# Altium PCB PCB1.PcbDoc
Units mil, origin at the board's own origin, x right, y up, seen from the top; angles counter-clockwise.
Board outline 2135 x 990 mil, 2 copper layers (Top Layer, Bottom Layer); 9 components, 5 nets, 22 pads, 0 vias.
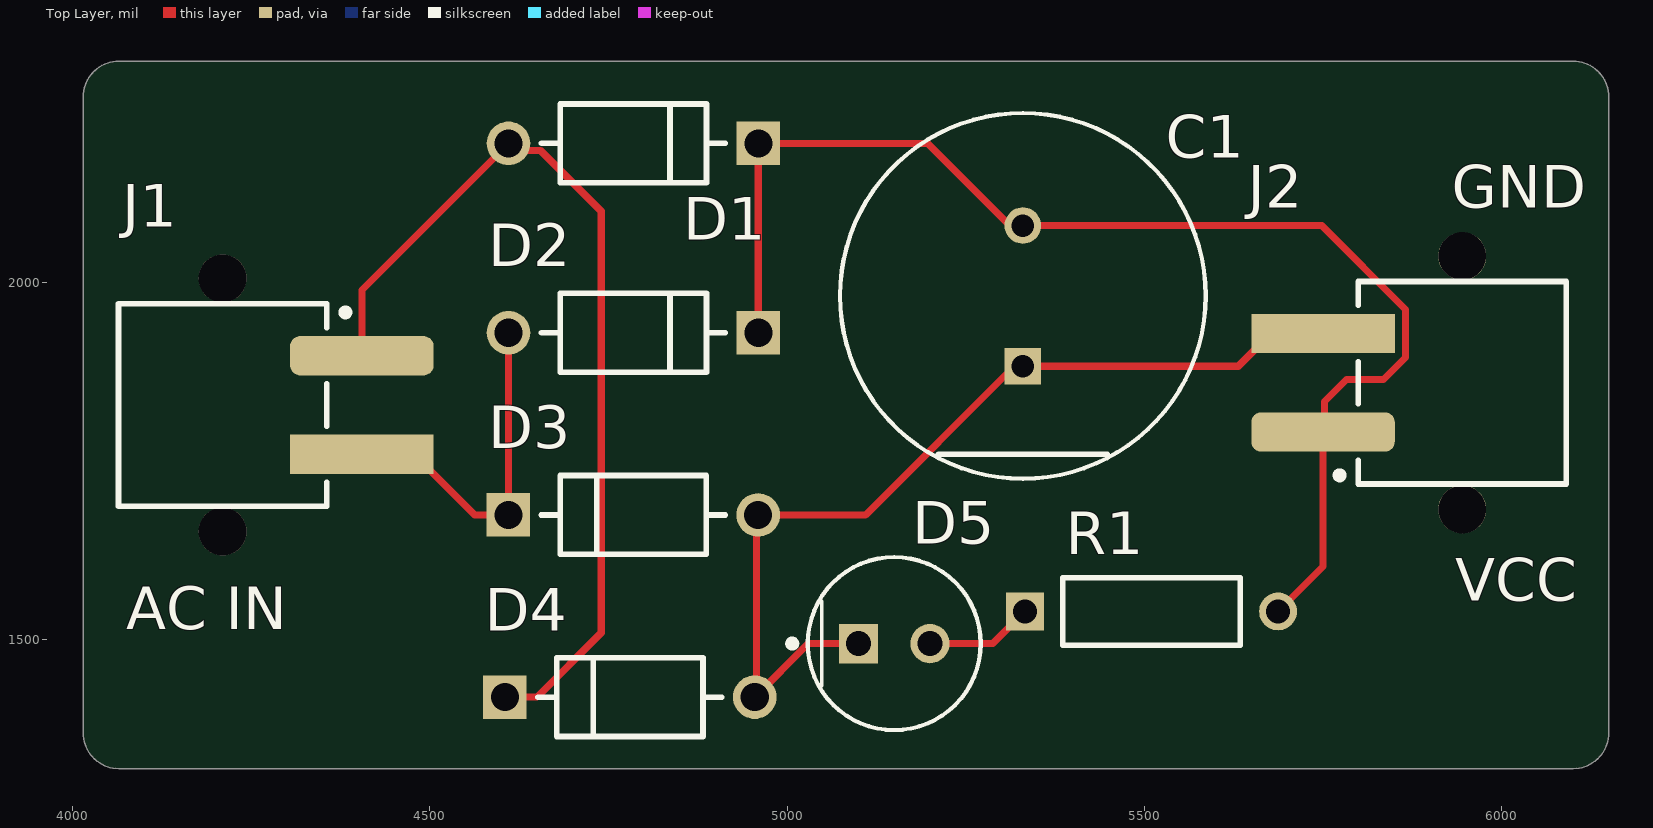
[diagram p0: Top Layer view]
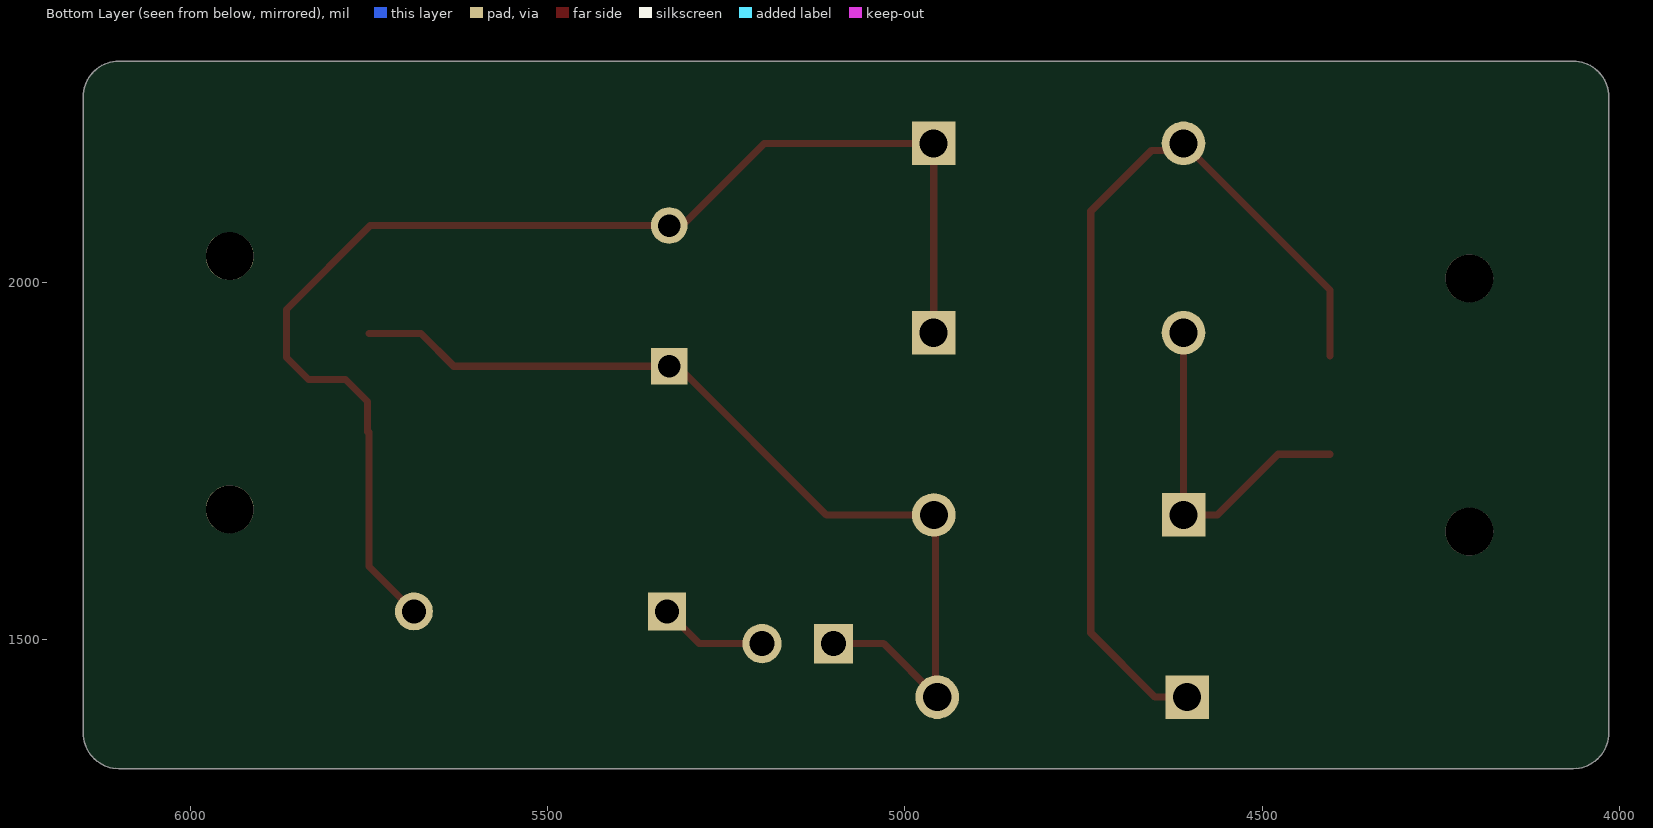
[diagram p1: Bottom Layer view, seen from below]
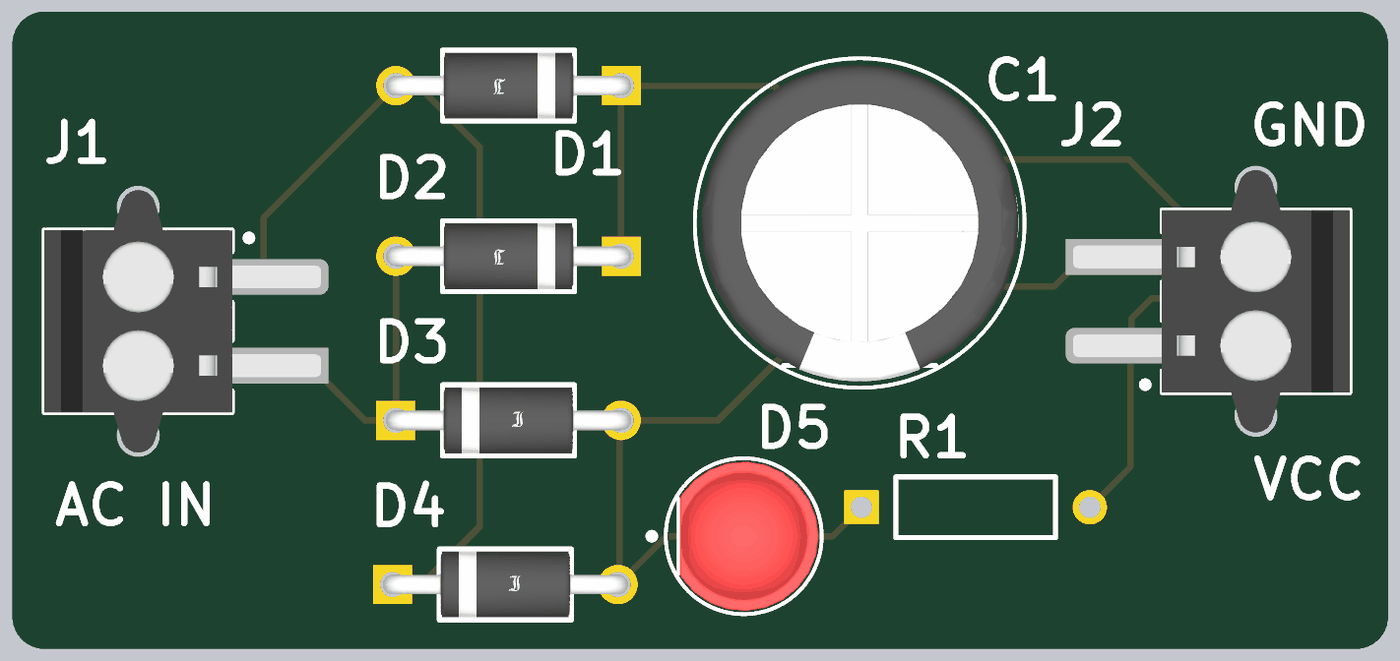
[diagram p2: 3D render of the assembled board from above, using the file's embedded part models]

## Layer stack, top to bottom
Top Solder: solder mask 0.4, Solder Resist, Dk 3.5
Top Layer: signal copper 1.4
Dielectric 1: dielectric 12.6, FR-4, Dk 4.8
Bottom Layer: signal copper 1.4
Bottom Solder: solder mask 0.4, Solder Resist, Dk 3.5

## Board outline
4015,1370 ccw(c4065,1370) 4065,1320 6100,1320 ccw(c6100,1370) 6150,1370 6150,2260 ccw(c6100,2260) 6100,2310 4065,2310 ccw(c4065,2260) 4015,2260

## Design rules (kind name [scope] priority, off if disabled: settings)
Clearance [All] p1: gap=10 ignorepadtopadclearanceinfootprint=FALSE
PolygonConnect [All] p1: connectstyle=Relief reliefconductorwidth=10 reliefentries=4 polygonreliefangle="90 Angle" airgapwidth=10
RoutingVias [All] p1: holewidth=28 width=50 viastyle="Through Hole" minholewidth=28 minwidth=50 maxholewidth=28 maxwidth=50
SolderMaskExpansion [All] p1: expansion=0 istentingtop=FALSE
SupplyNets "Schematic Supply Nets_1" [InNet('GND')] p1: voltage=0.000
SupplyNets "Schematic Supply Nets" [InNet('VCC')] p2: voltage=0.000
Width [All] p1: maxlimit=10 minlimit=10 preferedwidth=10
30 further rules are at their usual default settings.

## Components (designator, comment, footprint, x,y, rotation, side; value= is the part's Value field where it differs from the comment)
C1 "EEUFP1V102B" FP-RAD-TH-D_12_5_0_5-L_20-MFG 5330,1981.58 r90 top
D1 "1N4007" FP-1N4007-MFG 4785,2195 r180 top value=15pF
D2 "1N4007" FP-1N4007-MFG 4785,1930 r180 top value=15pF
D3 "1N4007" FP-1N4007-MFG 4784.8,1675 r0 top value=15pF
D4 "1N4007" FP-1N4007-MFG 4780,1420 r0 top value=15pF
D5 "XLUR12D" FP-XLUR12D-MFG 5150,1495 r0 top
J1 "691508110302" 691508110302 4210.12,1828.9 r270 top
J2 "691508110302" 691508110302 5945,1860 r90 top
R1 "MFR-25FBF52-1K" RESA60-630X240 5510,1540 r0 top

## Footprints (in the part's own frame and the unit in brackets; to place one, negate y for a bottom-side part, rotate by r counter-clockwise, add the part's x,y. Pads: shape width x height; smd on the part's side, far side on the other; paste and mask are expansions set on the pad)
691508110302 [mm] "WR-TBL Terminal block - serie 5081 3,50mm - SMT - Horizontal entry with rising clamp - 02p"
  rrect50% 1.4x5.1 smd: 1(-1.75,4.95)
  rect 1.4x5.1 smd: 2(1.75,4.95)
  round 1.7 hole 1.7 unplated: M1(-4.5,0) M2(4.5,0)
  silkscreen extent -3.6,-3.7 3.6,4.49, body extent -5.18,-3.7 5.17,7.2, height 11.25
FP-1N4007-MFG [mm]
  rect 1.55x1.55 hole 1 paste-2539.97 mask+0: 1(-4.44,0)
  round 1.55 hole 1 paste-2539.97 mask+0: 2(4.44,0)
  silkscreen extent -3.27,-1.4 3.27,1.4, body extent -5.32,-1.5 5.32,1.5, height 0.25
FP-RAD-TH-D_12_5_0_5-L_20-MFG [mm]
  rect 1.3x1.3 hole 0.8 paste-2539.97 mask+0: 1(-2.5,0)
  round 1.3 hole 0.8 paste-2539.97 mask+0: 2(2.5,0)
  silkscreen extent -6.5,-6.5 6.5,6.5, body extent -6.6,-6.6 6.6,6.6, height 0.25
FP-XLUR12D-MFG [mm]
  rect 1.4x1.4 hole 0.9 paste-2539.97 mask+0: 1(-1.27,0)
  round 1.4 hole 0.9 paste-2539.97 mask+0: 2(1.27,0)
  silkscreen extent -3.75,-3.08 3.08,3.08, body extent -3.17,-3.17 3.17,3.17, height 0.25
RESA60-630X240 [mm] "Axial Resistor, 2-Leads, Dia 2.4mm, Body Length 6.3mm"
  rect 1.35x1.35 hole 0.85: 1(-4.5,0)
  round 1.35 hole 0.85: 2(4.5,0)
  silkscreen extent -3.15,-1.2 3.15,1.2, body extent -3.15,-1.2 3.15,1.2, height 2.4

## Part data
C1: library part CMP-05427-001378-1, "Aluminum Electrolytic Capacitors (Radial Lead Type) AEC-Q200 Qualified 1000uF ±20% 35V", RoHS Compliant=Yes
D1 D2 D3 D4: library part CMP-123542-000001-1, "Rectifier diode 1000 V 1 A DO-41, ,", Capacitance=15pF, Forward Current=1A, Manufacturer=Diotec, Max Junction Temp=+175°C, Max Repetitive Reverse Voltage=1000V, Max Surge Forward Current=27A, Peak Reverse Current=5uA, Temperature="-50°C to +175°C", Temperature Range Low=-50°C, Automotive=No, Category=Diode, ComponentLink2Description=Datasheet, ComponentLink2URL=https://datasheet.octopart.com/1N4007-Diotec-datasheet-62346875.pdf, Device Class L1="Discrete Semiconductors", Device Class L2=Diodes, Device Class L3="Rectifier Diodes", Height=2.8mm, Ipc Land Pattern Name=DIOAD888W100L520D280, Lead Free=Yes, Manufacturer Part Number=1N4007, Octopart=https://octopart.com/1n4007-diotec-4040411, Package=1N4007, Reverse Voltage=1000V, RoHS=TRUE, Temperature Range High=+175°C
D5: library part CMP-02085-08376351-1, "627nm Red LED; 5x8.6mm, Through-Hole Mount with Red Diffused Round Lamp", Case/Package=Radial, Color=Red, Forward Voltage=1.9V, Test Current=10mA, Dominant Wavelength=617nm, Height=8.6mm, Lens Color=Red, Lens Transparency=Diffused, Lifecycle Status=Production, Luminous Intensity=39mcd, Mount="Through Hole", RoHS=Compliant, Viewing Angle=30°, Wavelength=627nm
J1 J2: library part CMP-1502-02490-3, "5081 Series 3.5MM Pitch Horizontal, Pcb Terminal Block, Surface Mount, 2 Way", Color=Black, Current=10A, Max Operating Temperature=130°C, Min Operating Temperature=-40°C, Voltage=300V, Contact Plating=Tin, Housing Material=Polymer, Lead Pitch=3.5mm, Length=7mm, Mount="Surface Mount", Number of Levels=1, Number of Pins=2, Number of Positions Per Level=2, Pitch=3.5mm, Plating="Brass, Steel, Tin", RoHS=Compliant, Termination=Screw, Wire Gauge (Max)=30AWG, Wire Gauge (Min)=16AWG
R1: library part CMP-1659-00075-1, "Axial Resistor, 1 KOhm, +/- 1%, 250 mW, -55 to 155 degC, 2-Pin THD, RoHS, Bulk", Case\Package=Axial, Max Operating Temperature="155 degC", Min Operating Temperature="-55 degC", Package Quantity=200, Power Rating="250 mW", Resistance="10 kohm", Tolerance=1%, Voltage Rating="250 V", ComponentLink1Description="Manufacturer URL", ComponentLink1URL=http://www.yageo.com/, ComponentLink2Description=Datasheet, ComponentLink2URL=http://www.yageo.com/documents/recent/Yageo%20LR_MFR_2013.pdf, DatasheetVersion=Apr-13, Length="0.248 inch", PackageDescription="2-Pin Axial Lead, Dia 2.4 mm, Body Length 6.3 mm", PackageReference=MFR-25, Packaging=Bulk, RoHSCompliant=true

## Nets (pads, with @x,y where several pads share a name; then routed paths per layer and width w, separated by ;. In a path a pad name is that pad's centre, name@x,y a point inside that pad or via, vN(x,y) a via of type N, cw(c..) or ccw(c..) an arc to the next point about the centre after c; other vN are vias at no path point)
GND: C1.1 D3.2 D4.2 D5.1 J2.2 | length 1312.6
  Top Layer w10: D5.1 5029.8,1495 D4.2 4957.21,1422.4 4957.21,1672.6 D3.2 5110,1675 C1.1@5315,1880 ; C1.1 5631.54,1883.15 5677.28,1928.9 J2.2
NetD1_2: D1.2 D4.1 J1.1 | length 1313.4
  Top Layer w10: J1.1 4405,1989.8 D1.2 4619.96,2185.24 4654.76,2185.24 4740,2100 4740,1510 4650,1420 D4.1
NetD2_2: D2.2 D3.1 J1.2 | length 495.3
  Top Layer w10: J1.2 4477.83,1760 4562.83,1675 D3.1 4610.2,1675.2 D2.2
NetD5_2: D5.2 R1.1 | length 151.5
  Top Layer w10: D5.2 5287.84,1495 R1.1
VCC: C1.2 D1.1 D2.1 J2.1 R1.2 | length 1779.3
  Top Layer w10: D2.1 D1.1 5196.85,2195 C1.2@5315,2076.85 ; C1.2 5748.18,2080 5865.51,1962.67 5865.51,1895.13 5834.78,1864.39 5782.9,1864.39 5752.17,1833.66 J2.1@5752.17,1791.1 ; R1.2 5750.12,1602.95 J2.1
pads on no net: J1.M1 J1.M2 J2.M1 J2.M2

## Silkscreen, mask and mechanical layers (free items; w line width, h text height)
Top Overlay:
  text "GND" at 5930,2105 h60
  text "VCC" at 5935,1555 h60
  text "AC IN" at 4075,1515 h60
Mechanical 1:
  lines w10: 4015,1370 ccw(c4065,1370) 4065,1320 6100,1320 ccw(c6100,1370) 6150,1370 6150,2260 ccw(c6100,2260) 6100,2310 4065,2310 ccw(c4065,2260) 4015,2260 4015,1875 4015,1370